# EAGLE board io-a-2 (EAGLE 9.6.2)
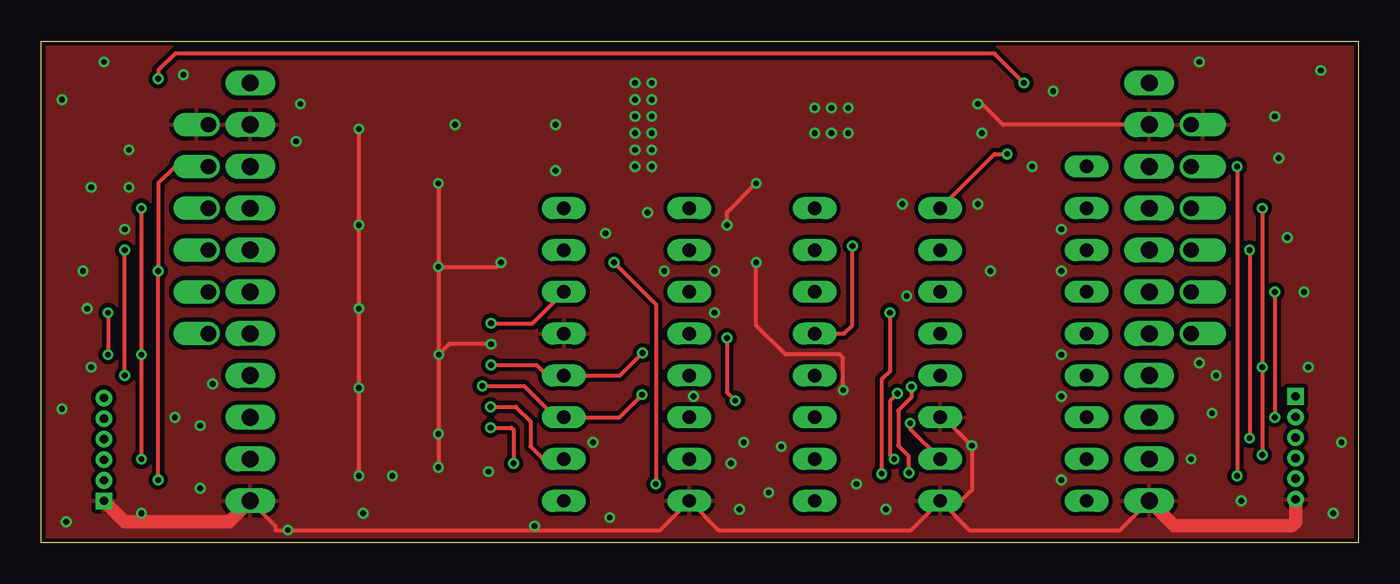
[diagram p0: board, top side]
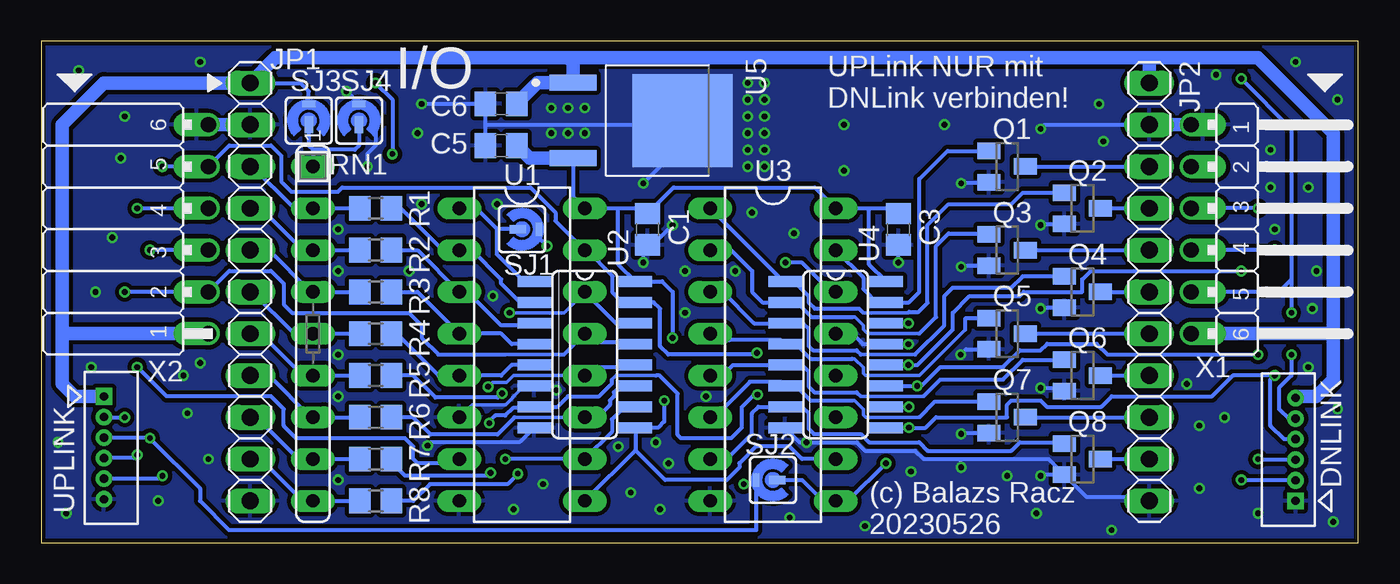
[diagram p1: board, bottom side, seen from below]

Size 80.01 x 30.48 mm. Coordinates in mm from the lower left corner, seen from the top.
Outline: 80.01,0 0,0 0,30.48 80.01,30.47 80.01,0
Copper layers (1*16): Top 0.035mm / dielectric 1.5mm / Bottom 0.035mm
Design rules "SeeedStudio_2layer_DRU_no_angle_20140221": minimum track width 6mil, minimum drill 12mil, track to track 6mil, track to pad 6mil, pad to pad 6mil, via to via 6mil, smd to smd 0mil, copper to edge 10mil, drill to drill 10mil, minimum pad ring 10mil, minimum via ring 6mil, stop-mask expansion 2mil, vias tented up to drill 100mil, thermal gap 10mil

## Footprints (pad centres in the part's own frame; a part is rotated, then mirrored left to right if it is on the bottom)
C0805 = smd 1.3 x 1.5: 1 -0.95,0; 2 0.95,0
1X11 = drill 1.016 long: 1 -12.7,0; 2 -10.16,0; 3 -7.62,0; 4 -5.08,0; 5 -2.54,0; 6 0,0; 7 2.54,0; 8 5.08,0; 9 7.62,0; 10 10.16,0; 11 12.7,0
SOT23 = smd 1 x 1.4: 1 -0.95,-1.1; 2 0.95,-1.1; 3 0,1.1
R0805 = smd 1.3 x 1.5: 1 -0.95,0; 2 0.95,0
SIL9 = drill 0.813 long: 1 -10.16,0; 2 -7.62,0; 3 -5.08,0; 4 -2.54,0; 5 0,0; 6 2.54,0; 7 5.08,0; 8 7.62,0; 9 10.16,0
SJ_RND2 = smd 1.016 x 0.508: P$1 -0.254,0 | smd 0.406 x 0.813: P$2 1.016,0
DIL16 = drill 0.813 long: 1 -8.89,-3.81; 2 -6.35,-3.81; 3 -3.81,-3.81; 4 -1.27,-3.81; 5 1.27,-3.81; 6 3.81,-3.81; 7 6.35,-3.81; 8 8.89,-3.81; 9 8.89,3.81; 10 6.35,3.81; 11 3.81,3.81; 12 1.27,3.81; 13 -1.27,3.81; 14 -3.81,3.81; 15 -6.35,3.81; 16 -8.89,3.81
SO16 = smd 0.66 x 2.032: 1 -4.445,-3.073; 2 -3.175,-3.073; 3 -1.905,-3.073; 4 -0.635,-3.073; 5 0.635,-3.073; 6 1.905,-3.073; 7 3.175,-3.073; 8 4.445,-3.073; 9 4.445,3.073; 10 3.175,3.073; 11 1.905,3.073; 12 0.635,3.073; 13 -0.635,3.073; 14 -1.905,3.073; 15 -3.175,3.073; 16 -4.445,3.073
DPAK229P990X238-4N = smd 0.97 x 2.83: 1 -2.29,-4.14; 3 2.29,-4.14 | smd 5.63 x 6.09: 2 0,2.51
JP6F = drill 0.914 offset: 1 -8.89,0; 2 -6.35,0; 3 -3.81,0; 4 -1.27,0; 5 1.27,0; 6 3.81,0
JP6F-FEM = drill 0.914 offset: 1 -8.89,0; 2 -6.35,0; 3 -3.81,0; 4 -1.27,0; 5 1.27,0; 6 3.81,0
CON_530470610_MOL = drill 0.5 pad 0.85 square: 1 0,0 | drill 0.5 pad 0.85: 2 -1.25,0; 3 -2.5,0; 4 -3.75,0; 5 -5,0; 6 -6.25,0

## Placement (x,y rotation side)
C1  [C0805]  43.18,19.05 270 bottom
C3  [C0805]  27.94,19.05 270 bottom
C5  [C0805]  52.07,24.13 180 bottom
C6  [C0805]  52.07,26.67 180 bottom
JP1  INPUTS  [1X11]  67.31,15.24 270 bottom
JP2  OUTPUTS  [1X11]  12.7,15.24 270 bottom
Q1  BSS123  [SOT23]  21.34,22.86 270 bottom
Q2  BSS123  [SOT23]  16.76,20.32 270 bottom
Q3  BSS123  [SOT23]  21.34,17.78 270 bottom
Q4  BSS123  [SOT23]  16.76,15.24 270 bottom
Q5  BSS123  [SOT23]  21.34,12.7 270 bottom
Q6  BSS123  [SOT23]  16.76,10.16 270 bottom
Q7  BSS123  [SOT23]  21.34,7.62 270 bottom
Q8  BSS123  [SOT23]  16.76,5.08 270 bottom
R1  [R0805]  59.69,20.32 180 bottom
R2  [R0805]  59.69,17.78 180 bottom
R3  [R0805]  59.69,15.24 180 bottom
R4  [R0805]  59.69,12.7 180 bottom
R5  [R0805]  59.69,10.16 180 bottom
R6  [R0805]  59.69,7.62 180 bottom
R7  [R0805]  59.69,5.08 180 bottom
R8  [R0805]  59.69,2.54 180 bottom
RN1  10K  [SIL9]  63.5,12.7 270 bottom
SJ1  [SJ_RND2]  50.8,19.05 0 bottom
SJ2  [SJ_RND2]  35.56,3.81 180 bottom
SJ3  [SJ_RND2]  63.75,25.65 90 bottom
SJ4  [SJ_RND2]  60.71,25.65 90 bottom
U1  74HC166  [DIL16]  50.8,11.43 270 bottom
U2  74HC166  [SO16]  46.99,11.43 270 bottom
U3  74HC595  [DIL16]  35.56,11.43 270 bottom
U4  74HC595  [SO16]  31.75,11.43 270 bottom
U5  MC7805BDTRKG  [DPAK229P990X238-4N]  43.56,25.65 270 bottom
X1  DNLINK  [JP6F]  10.16,16.51 270 bottom
X2  UPLINK  [JP6F-FEM]  69.85,21.59 90 bottom
X3  MOLEX_530470610CON_530470610_MOL  [CON_530470610_MOL]  76.2,8.89 90 bottom
X4  MOLEX_530470610CON_530470610_MOL  [CON_530470610_MOL]  3.81,2.54 270 bottom

## Library data of the parts
C1 C3 C5 C6 = rcl; SPICEPREFIX: C
JP1 JP2 = pinhead
Q1-Q8 = transistor-small-signal
R1-R8 = rcl; SPICEPREFIX: R
RN1 = resistor-sil; OC_FARNELL: unknown; OC_NEWARK: unknown
SJ1-SJ4 U1-U4 = trainlib
U5 = MC7805BDTRKG; MANUFACTURER: ON Semiconductor; PARTREV: 27; STANDARD: IPC-7351B
X1 X2 = eagleparts
X3 X4 = eagleparts; COPYRIGHT: Copyright (C) 2023 Ultra Librarian. All rights reserved.; MANUFACTURER_PART_NUMBER: 530470610; MFR_NAME: Molex Connector Corporation

## Nets
+5V: C1.1 C3.1 C5.1 U1.9 U1.16 U2.9 U2.16 U3.10 U3.16 U4.10 U4.16 U5.3
+12V: C6.1 JP1.1 JP2.1 SJ3.P$2 U5.1 X1.6 X2.1 X3.1 X4.6
GND: C1.2 C3.2 C5.2 C6.2 JP1.2 JP1.11 JP2.2 JP2.11 Q1.2 Q2.2 Q3.2 Q4.2 Q5.2 Q6.2 Q7.2 Q8.2 SJ4.P$2 U1.6 U1.8 U2.6 U2.8 U3.8 U3.13 U4.8 U4.13 U5.2 X1.1 X2.6 X3.6 X4.1
LATCH: U1.15 U2.15 U3.12 U4.12 X1.2 X2.5 X3.5 X4.2
MISO-DN: SJ1.P$1 U1.1 U2.1 X1.5 X4.5
MISO-UP: SJ1.P$2 U1.13 U2.13 X2.2 X3.2
MOSI-DN: SJ2.P$1 U3.9 U4.9 X1.4 X4.4
MOSI-UP: SJ2.P$2 U3.14 U4.14 X2.3 X3.3
N$1: RN1.1 SJ3.P$1 SJ4.P$1
N$19: JP2.6 Q4.3
N$20: JP2.5 Q3.3
N$21: JP2.4 Q2.3
N$22: JP2.3 Q1.3
N$27: JP1.3 R1.2 RN1.2
N$28: JP1.4 R2.2 RN1.3
N$29: JP1.5 R3.2 RN1.4
N$30: JP1.6 R4.2 RN1.5
N$31: JP1.7 R5.2 RN1.6
N$32: JP1.8 R6.2 RN1.7
N$33: JP1.9 R7.2 RN1.8
N$34: JP1.10 R8.2 RN1.9
N$35: JP2.7 Q5.3
N$36: JP2.8 Q6.3
N$37: JP2.9 Q7.3
N$38: JP2.10 Q8.3
PA: Q1.1 U3.15 U4.15
PB: Q2.1 U3.1 U4.1
PC: Q3.1 U3.2 U4.2
PD: Q4.1 U3.3 U4.3
PE: Q5.1 U3.4 U4.4
PF: Q6.1 U3.5 U4.5
PG: Q7.1 U3.6 U4.6
PH: Q8.1 U3.7 U4.7
QA: R1.1 U1.2 U2.2
QB: R2.1 U1.3 U2.3
QC: R3.1 U1.4 U2.4
QD: R4.1 U1.5 U2.5
QE: R5.1 U1.10 U2.10
QF: R6.1 U1.11 U2.11
QG: R7.1 U1.12 U2.12
QH: R8.1 U1.14 U2.14
SCK: U1.7 U2.7 U3.11 U4.11 X1.3 X2.4 X3.4 X4.3

## Tracks (layer width: path | path; a pad name or v marks a point on that pad's centre or on a via)
+5V  (via drill 0.35)
  Top 0.254: v27.3,8.25 28.83,8.25 29.72,7.37 29.72,5.84 30.48,5.08 U3.10 | v41.66,12.45 41.66,9.14 v42.16,8.64
  Bottom 0.254: 43.92,5.61 U2.9 42.55,6.99 42.16,7.37 v42.16,8.64 | 43.92,5.61 U1.9 | 44.96,20.32 U1.16 47.7,21.03 U5.3 | 44.96,20.32 43.5,20.32 C1.1 41.59,21.59 33.02,21.59 U3.16 29.72,20.32 | 44.96,20.32 44.96,16.92 U2.16 42.29,15.88 41.66,15.24 v41.66,12.45 | U4.16 29.72,16.92 29.72,20.32 | 29.72,20.32 28.26,20.32 C3.1 | U4.10 v27.31,8.26 v27.3,8.25 | U3.10 33.78,5.08 34.54,5.84 36.58,5.84 37.59,4.83 37.59,4.57 38.35,3.81 42.11,3.81 43.92,5.61
  Bottom 0.813: C5.1 50.35,23.36 U5.3
+12V
  Bottom 0.254: JP1.1 64.26,27.94 63.75,27.43 SJ3.P$2
  Bottom 0.813: X2.1 78.49,12.7 78.74,12.95 | 78.74,12.95 78.74,25.4 76.2,27.94 JP1.1 65.79,29.46 47.95,29.46 | 47.95,29.46 47.7,29.21 U5.1 49.85,27.94 C6.1 | JP2.1 12.7,29.46 | 47.95,29.46 12.7,29.46 | 12.7,29.46 6.1,29.46 1.52,24.89 1.52,12.95 | 1.52,12.95 1.78,12.7 X1.6 | X4.6 3.71,8.89 2.54,8.89 1.52,9.91 1.52,12.95 | X3.1 77.98,8.89 78.74,9.65 78.74,12.95
GND  (via drill 0.35)
  Top 0.254: U1.6 54.81,7.62 v56.54,5.89 56.54,3.2 55.88,2.54 U1.8 | JP2.11 14.22,1.02 14.22,0.76 37.59,0.76 U3.8 41.15,0.76 52.83,0.76 U1.8 | U1.8 56.39,0.76 65.53,0.76 JP1.11 | v48.72,9.27 48.72,11.23 48.51,11.43 45.21,11.43 43.43,13.21 v43.43,17.02 | JP1.2 58.42,25.4 57.15,26.67 v56.9,26.67 | v41.66,19.3 41.66,20.07 v43.43,21.84 | v24.13,21.84 v24.13,16.76 | v24.13,16.76 27.69,16.76 v27.94,17.02 | v24.13,16.76 24.13,11.46 v24.16,11.43 | v24.16,11.43 24.16,6.63 v24.13,6.6 v24.13,4.57 | v19.3,4.06 v19.3,9.4 v19.3,14.22 v19.3,19.3 v19.3,25.15 | v27.33,12.07 24.79,12.07 v24.16,11.43
  Top 0.813: JP2.11 11.43,1.27 5.08,1.27 X4.1 | JP1.11 68.83,1.02 75.95,1.02 76.2,1.27 X3.6
  Bottom 0.203: U1.6 53.85,8.38 51.79,8.38 51.39,8.79 51.39,8.81 50.68,9.53 U2.6
  Bottom 0.254: U2.8 50.95,6.1 56.34,6.1 v56.54,5.89 | U3.13 30.73,12.7 30.1,12.06 U4.13 v27.33,12.06 v27.33,12.07 | U4.8 33.93,6.1 30.48,6.1 29.97,5.59 26.92,5.59 26.42,5.08 24.13,5.08 | Q8.2 18.81,5.08 24.13,5.08 | U2.6 48.97,9.53 v48.72,9.27 | v43.43,17.02 43.43,17.85 C1.2 42.86,18.1 v41.66,19.3 | v56.9,26.67 C6.2 53.02,25.4 | C5.2 53.02,25.4 | 41.23,25.48 41.3,25.4 53.02,25.4 | 41.23,25.48 U5.2 | v43.43,21.84 41.23,24.05 41.23,25.48 | Q8.2 16.53,2.79 12.95,2.79 JP2.11 | Q1.2 22.5,21.84 v24.13,21.84 | v24.13,16.76 24.06,16.83 Q3.2 | v27.94,17.02 C3.2 | v24.16,11.43 23.84,11.75 Q5.2 | v24.13,6.6 24.06,6.67 Q7.2 | v24.13,4.57 24.13,5.08 | Q8.2 19.24,4.13 v19.3,4.06 | v19.3,9.4 18.05,9.4 Q6.2 | v19.3,14.22 19.24,14.29 Q4.2 | v19.3,19.3 19.24,19.37 Q2.2 | v19.3,25.15 19.05,25.4 JP2.2 | v61.47,27.43 SJ4.P$2 60.45,26.42 59.94,26.42 59.69,26.16 59.69,24.13 60.2,23.62 v60.2,22.86
  Bottom 0.813: X2.6 JP1.2 | X1.1 JP2.2
  other vias: 37.08,26.92 37.08,25.91 37.08,24.89 37.08,23.88 37.08,22.86 36.07,26.92 36.07,25.91 36.07,24.89 36.07,23.88 36.07,22.86 49.02,26.42 48.01,26.42 46.99,26.42 49.02,24.89 48.01,24.89 46.99,24.89 31.24,25.4 25.15,25.4 15.75,26.67 15.49,24.38 57.15,24.89 74.93,25.91 75.18,23.37 75.69,18.54 77.72,28.7 70.36,29.21 76.71,15.24 70.36,10.92 71.37,10.16 71.12,7.87 69.85,5.08 76.96,10.67 78.99,6.1 78.49,1.78 72.9,2.54 51.31,2.03 49.53,3.56 61.98,3.81 61.98,8.89 61.98,11.43 61.98,16.51 57.66,16.51 61.98,19.05 56.9,20.57 52.32,20.57 52.58,14.99 42.67,6.1 41.91,4.83 44.2,3.05 42.42,2.03 34.54,1.52 29.97,1.02 27.18,4.32 19.56,1.78 14.99,0.76 9.65,7.11 8.13,7.62 9.65,3.3 6.1,1.78 1.52,1.27 1.27,8.13 3.05,10.67 2.79,14.22 2.54,16.51 3.05,21.59 5.33,23.88 8.64,28.45 5.33,21.59 5.08,19.05 3.81,29.21 1.27,26.92 10.41,9.65 21.34,4.06 39.62,8.89 40.89,13.97 40.89,16.51 37.85,16.51 36.83,20.07 34.29,18.8 31.24,22.61 37.08,27.94 36.07,27.94 44.96,5.84 33.53,6.1
  pour Bottom (isolate 0.254): 79.76,30.23 79.76,0.25 0.25,0.25 0.25,30.23
  pour Top (isolate 0.254): 79.76,0.25 79.76,30.23 0.25,30.23 0.25,0.25
  pour Bottom (rank 2, no thermals): 44.96,28.7 44.96,22.35 37.08,22.35 37.08,28.7
LATCH  (via drill 0.35)
  Top 0.254: v27.33,10.79 30.1,10.79 30.73,10.16 U3.12 35.15,10.16 v36.52,11.53 | X1.2 8.13,22.86 7.11,21.84 v7.11,16.51 v7.11,3.81 | v72.64,22.86 v72.64,4.06
  Bottom 0.254: U4.12 v27.33,10.79 26.8,10.79 24.64,12.95 24.64,13.97 23.62,14.99 20.57,14.99 20.32,15.24 16.76,15.24 16.76,16 16.26,16.51 v7.11,16.51 | v36.52,11.53 36.63,11.43 41.91,11.43 42.42,11.94 42.42,14.22 42.8,14.61 U2.15 44.7,14.61 45.29,15.19 45.29,16.2 46.86,17.78 U1.15 48.77,19.56 48.77,20.07 50.29,21.59 61.72,21.59 61.98,21.34 64.82,21.34 65.43,21.95 65.43,23.52 66.04,24.13 68.58,24.13 X2.5 v72.64,22.86 | X4.2 7.09,3.79 v7.11,3.81 | v72.64,4.06 72.82,3.89 X3.5
MISO-DN  (via drill 0.35)
  Top 0.254: U1.1 57.91,23.62 v58.67,23.62 | v59.69,27.94 57.91,29.72 8.13,29.72 7.11,28.7 v7.11,28.19 | v4.06,13.97 v4.06,11.43
  Bottom 0.254: SJ1.P$1 52.32,19.05 | U1.1 53.59,20.32 52.32,19.05 | U2.1 50.19,16 50.8,16 52.32,17.53 52.32,19.05 | v58.67,23.62 58.67,26.92 v59.69,27.94 | X1.5 4.83,15.24 4.06,16 | v7.11,28.19 4.06,25.15 4.06,16 | 4.06,16 v4.06,13.97 | v4.06,11.43 4.06,10.16 4.83,9.4 4.83,8.13 4.24,7.54 X4.5
MISO-UP  (via drill 0.35)
  Top 0.254: U1.13 48.77,12.7 49.28,13.21 v49.28,18.03 | v74.93,15.24 v74.93,7.62
  Bottom 0.203: 51.82,11.43 48.51,11.43
  Bottom 0.254: U2.13 44.04,12.19 46.48,12.19 U1.13 48.26,11.43 48.51,11.43 | 51.82,11.43 55.88,11.43 56.9,12.45 56.9,13.21 57.66,13.97 64.77,13.97 65.28,14.48 65.28,15.75 66.04,16.51 68.58,16.51 X2.2 v74.93,15.24 | v49.28,18.03 49.78,18.54 SJ1.P$2 | v74.93,7.62 76.18,7.62 X3.2
MOSI-DN  (via drill 0.35)
  Top 0.254: v27.3,6.99 28.57,6.99 28.7,6.86 v28.7,4.83 | v5.08,10.16 v5.08,17.78
  Bottom 0.254: U4.9 v27.31,6.99 v27.3,6.99 26.29,6.99 25.65,7.62 21.34,7.62 21.34,8.38 21.08,8.64 19.3,8.64 18.92,8.26 15.62,8.26 14.99,8.89 8.89,8.89 7.62,10.16 v5.08,10.16 5.33,9.91 5.33,7.11 4.51,6.29 X4.4 | v28.7,4.83 30.99,2.54 U3.9 32.51,2.54 33.78,3.81 SJ2.P$1 | v5.08,17.78 X1.4
MOSI-UP  (via drill 0.35)
  Top 0.254: v27.33,13.34 29.84,13.34 U3.14 | v34.8,17.02 37.34,14.48 v37.34,3.56 | v73.41,17.78 v73.41,6.35
  Bottom 0.254: U4.14 v27.33,13.34 | U3.14 32,15.24 33.78,17.02 v34.8,17.02 | v37.34,3.56 36.58,3.56 SJ2.P$2 36.58,0.76 68.58,0.76 70.36,2.54 70.36,3.3 v73.41,6.35 73.45,6.39 X3.3 | X2.3 v73.41,17.78
N$1
  Bottom 0.254: SJ4.P$1 60.71,24.13 60.96,23.88 63.5,23.88 | 63.5,23.88 RN1.1 | SJ3.P$1 63.75,24.13 63.5,23.88
N$19
  Bottom 0.254: Q4.3 JP2.6
N$20
  Bottom 0.254: Q3.3 JP2.5
N$21
  Bottom 0.254: Q2.3 JP2.4
N$22
  Bottom 0.254: Q1.3 JP2.3
N$27
  Bottom 0.254: R1.2 RN1.2 64.64,20.32 67.18,22.86 JP1.3
N$28
  Bottom 0.254: R2.2 RN1.3 64.14,17.78 66.67,20.32 JP1.4
N$29
  Bottom 0.254: R3.2 RN1.4 63.63,15.24 66.17,17.78 JP1.5
N$30
  Bottom 0.254: R4.2 RN1.5 64.64,12.7 67.18,15.24 JP1.6
N$31
  Bottom 0.254: R5.2 RN1.6 64.14,10.16 66.67,12.7 JP1.7
N$32
  Bottom 0.254: R6.2 RN1.7 63.63,7.62 66.17,10.16 JP1.8
N$33
  Bottom 0.254: R7.2 RN1.8 64.39,5.08 66.93,7.62 JP1.9
N$34
  Bottom 0.254: R8.2 RN1.9 64.14,2.54 66.67,5.08 JP1.10
N$35
  Bottom 0.254: Q5.3 JP2.7
N$36
  Bottom 0.254: Q6.3 JP2.8
N$37
  Bottom 0.254: Q7.3 JP2.9
N$38
  Bottom 0.254: Q8.3 JP2.10
PA
  Bottom 0.254: Q1.1 24.96,23.81 26.67,22.1 26.67,15.24 27.3,14.61 U4.15 29.26,14.61 30.07,15.42 30.07,16.1 U3.15
PB
  Bottom 0.203: 30.07,13.97 27.33,13.97 27.28,14.02
  Bottom 0.254: 30.07,13.97 30.33,14.22 33.02,14.22 33.4,14.61 33.4,15 34.28,15.88 U4.1 34.92,15.88 U3.1 | 27.28,14.02 26.72,14.02 26.16,14.58 26.16,19.3 24.89,20.57 21.08,20.57 20.39,21.27 Q2.1
PC
  Bottom 0.203: 30.73,13.72 30.58,13.72 30.07,13.21 30.07,12.95 29.82,12.7 26.72,12.7
  Bottom 0.254: 30.73,13.72 33.22,13.72 34.11,14.61 U4.2 36.2,14.61 36.83,15.24 36.83,16.51 38.1,17.78 U3.2 | 26.72,12.7 26.67,12.7 25.65,13.72 25.65,18.03 24.89,18.8 22.5,18.8 Q3.1
PD
  Bottom 0.203: 30.23,11.43 26.92,11.43
  Bottom 0.254: 30.23,11.43 30.48,11.68 33.12,11.68 33.4,11.96 33.4,13.01 33.73,13.34 U4.3 36.7,13.34 38.61,15.24 U3.3 | 26.92,11.43 25.15,13.21 25.15,14.99 24.64,15.49 21.08,15.49 20.39,16.19 Q4.1 | Q4.1
PE
  Bottom 0.203: 30.73,11.18 30.61,11.18 30.07,10.64 30.07,10.29 29.95,10.16 26.67,10.16 23.88,12.95
  Bottom 0.254: 30.73,11.18 33.27,11.18 34.16,12.06 U4.4 35.08,12.32 38.23,12.32 38.61,12.7 U3.4 | Q5.1 23.84,13.65 23.88,13.61 23.88,12.95
PF
  Bottom 0.203: 30.23,8.89 26.42,8.89
  Bottom 0.254: 30.23,8.89 30.48,9.14 33.05,9.14 33.4,9.5 33.4,10.41 33.78,10.79 U4.5 37.97,10.79 38.61,10.16 U3.5 | 26.42,8.89 25.4,9.91 21.59,9.91 20.39,11.11 Q6.1
PG
  Bottom 0.203: 30.73,8.64 30.61,8.64 30.07,8.1 30.07,7.77 29.92,7.62 26.67,7.62
  Bottom 0.254: 30.73,8.64 33.27,8.64 34.16,9.53 U4.6 35.08,9.78 36.96,9.78 39.12,7.62 U3.6 | Q7.1 25.72,8.57 26.67,7.62
PH
  Bottom 0.254: Q8.1 17.93,6.1 20.57,6.1 21.08,5.59 26.16,5.59 26.67,6.1 29.72,6.1 30.23,6.6 33.07,6.6 33.4,6.93 33.4,7.87 33.78,8.26 U4.7 36.45,8.26 36.83,7.87 36.83,6.6 38.35,5.08 U3.7
QA
  Bottom 0.254: R1.1 58.17,20.32 55.63,17.78 U1.2 53.85,17.78 52.07,16 52.07,15.75 50.93,14.61 U2.2
QB
  Bottom 0.254: R2.1 57.15,17.78 U1.3 54.1,15.24 52.07,13.21 50.19,13.21 U2.3
QC
  Bottom 0.254: R3.1 57.15,15.24 U1.4 52.07,12.7 51.44,12.06 U2.4
QD
  Bottom 0.254: R4.1 58.42,12.7 55.88,10.16 U1.5 52.07,10.16 51.44,10.79 U2.5
QE  (via drill 0.35)
  Top 0.254: v52.02,9.07 51.56,8.61 51.56,5.33 v51.82,5.08
  Bottom 0.254: U2.10 44.17,8.26 44.3,8.13 44.7,8.13 45.34,7.49 45.34,6.73 U1.10 v51.82,5.08 | v52.02,9.07 52.27,8.81 56.06,8.81 57.4,10.16 R5.1
QF
  Bottom 0.203: U1.11 51.26,7.62
  Bottom 0.254: U2.11 44.83,9.53 45.21,9.14 45.21,8.89 45.47,8.64 45.47,8.38 46.23,7.62 U1.11 | 51.26,7.62 52.3,6.58 56.36,6.58 57.4,7.62 R6.1
QG  (via drill 0.35)
  Top 0.254: v52.86,9.47 52.86,8.81 52.07,8.03 52.07,5.89 52.68,5.28 52.68,4.27 v52.7,4.24
  Bottom 0.203: U1.12 51.31,10.16 51.74,9.73 52.6,9.73 v52.86,9.47
  Bottom 0.254: U1.12 46.48,10.67 44.04,10.67 U2.12 | v52.7,4.24 52.88,4.06 57.91,4.06 58.74,4.89 R7.1
QH  (via drill 0.35)
  Top 0.254: v51.56,13.97 51.56,10.41 51.05,9.91 v51.05,4.19
  Bottom 0.203: U1.14 48.26,13.97 v51.56,13.97
  Bottom 0.254: U2.14 45.09,13.34 U1.14 | v51.05,4.19 51.69,3.56 56.39,3.56 57.4,2.54 R8.1
SCK  (via drill 0.35)
  Top 0.254: v52.78,7.26 52.78,6.91 U1.7 | v26.8,9.53 29.34,9.53 31.24,7.62 U3.11 35.13,7.62 v36.5,8.99 | v74.17,20.32 v74.17,10.67 v74.17,5.33 | v6.1,20.32 v6.1,11.43 v6.1,5.08
  Bottom 0.203: 45.34,9.91 45.09,10.16 42.67,10.16
  Bottom 0.254: v52.78,7.26 52.88,7.26 52.43,7.72 51.82,7.72 51.36,8.18 50.14,8.18 U2.7 48.64,8.26 48.01,8.89 46.11,8.89 45.34,9.66 45.34,9.91 | U4.11 v26.8,9.53 26.54,9.53 25.4,10.67 21.59,10.67 20.57,11.68 19.3,11.68 18.9,12.09 15.9,12.09 15.24,11.43 v6.1,11.43 | U1.7 54.86,4.83 57.15,4.83 57.4,5.08 57.4,5.84 57.91,6.35 64.52,6.35 65.28,7.11 65.28,8.13 66.04,8.89 72.39,8.89 v74.17,10.67 | v36.5,8.99 36.7,8.99 37.47,8.23 37.47,6.99 38.1,6.35 41.15,6.35 41.35,6.55 41.35,9.07 42.44,10.16 42.67,10.16 | v74.17,20.32 X2.4 | v6.1,20.32 X1.3 | X4.3 6.06,5.04 v6.1,5.08 | X3.4 74.36,5.14 v74.17,5.33

## Text on the board
bNames: I/O | UPLink NUR mit / DNLink verbinden! | DNLINK | UPLINK | (c) Balazs Racz / 20230526